# Altium PCB board1_v2.PcbDoc
Units mil, origin at the board's own origin, x right, y up, seen from the top; angles counter-clockwise.
Board outline 3500 x 2000 mil, 2 copper layers (Top Layer, Bottom Layer), stack 61.756 mil thick; 22 components, 12 nets, 57 pads, 11 vias.
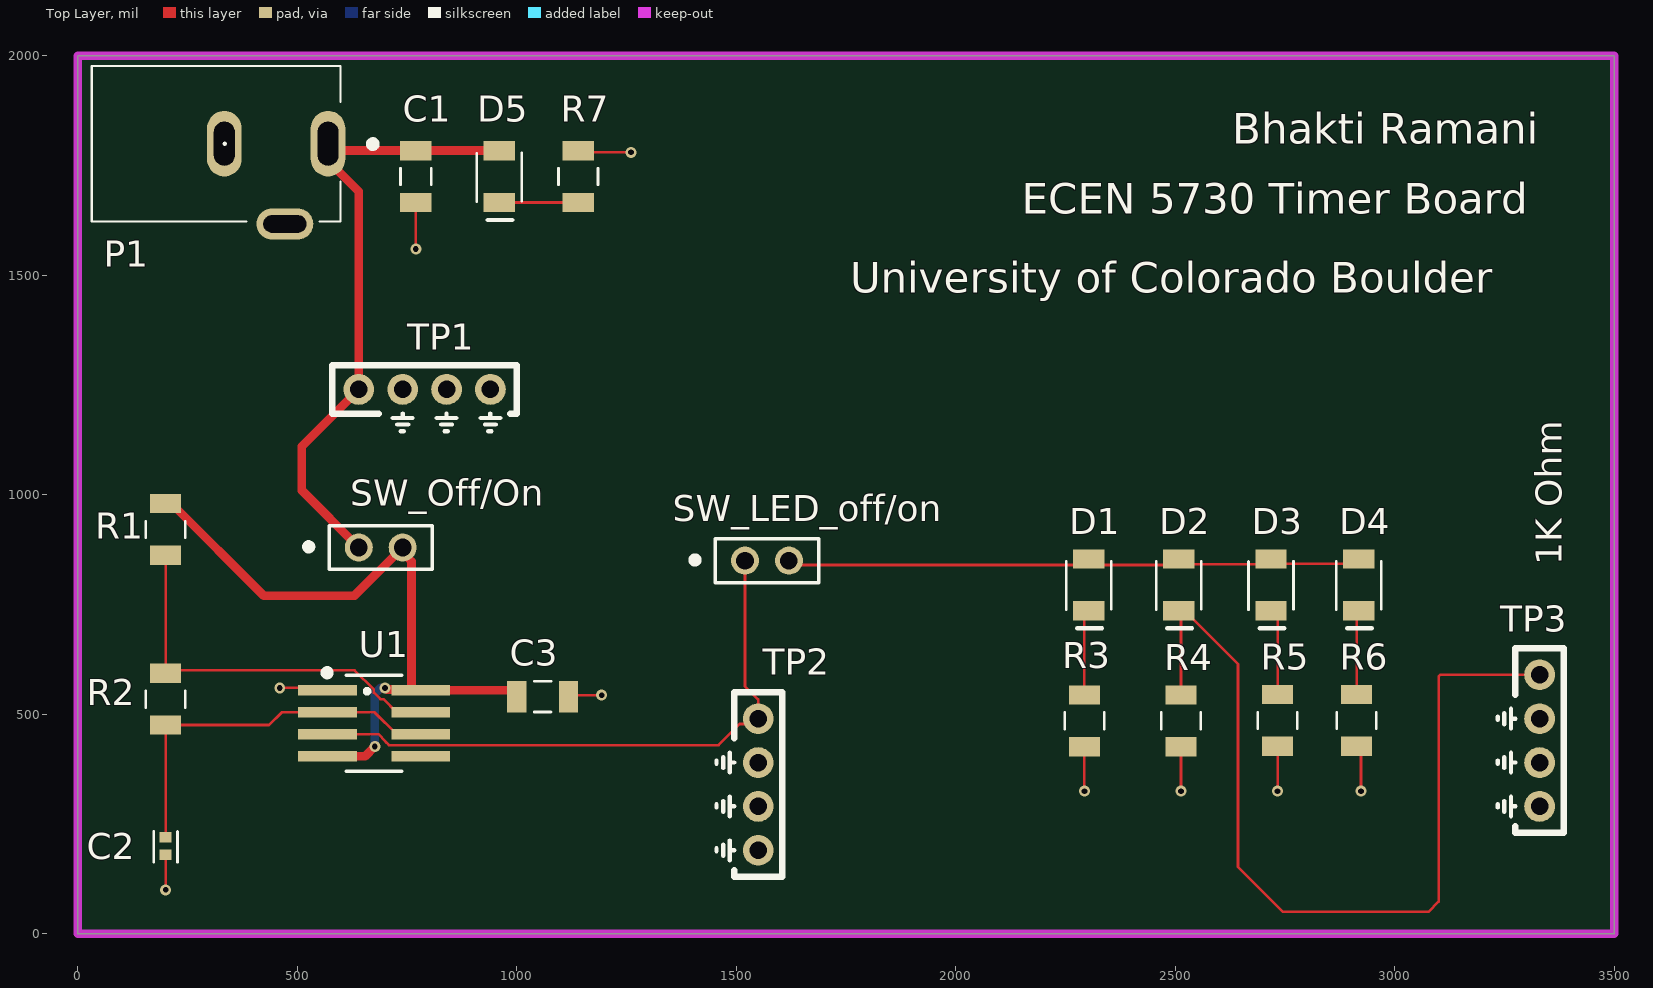
[diagram p0: Top Layer view]
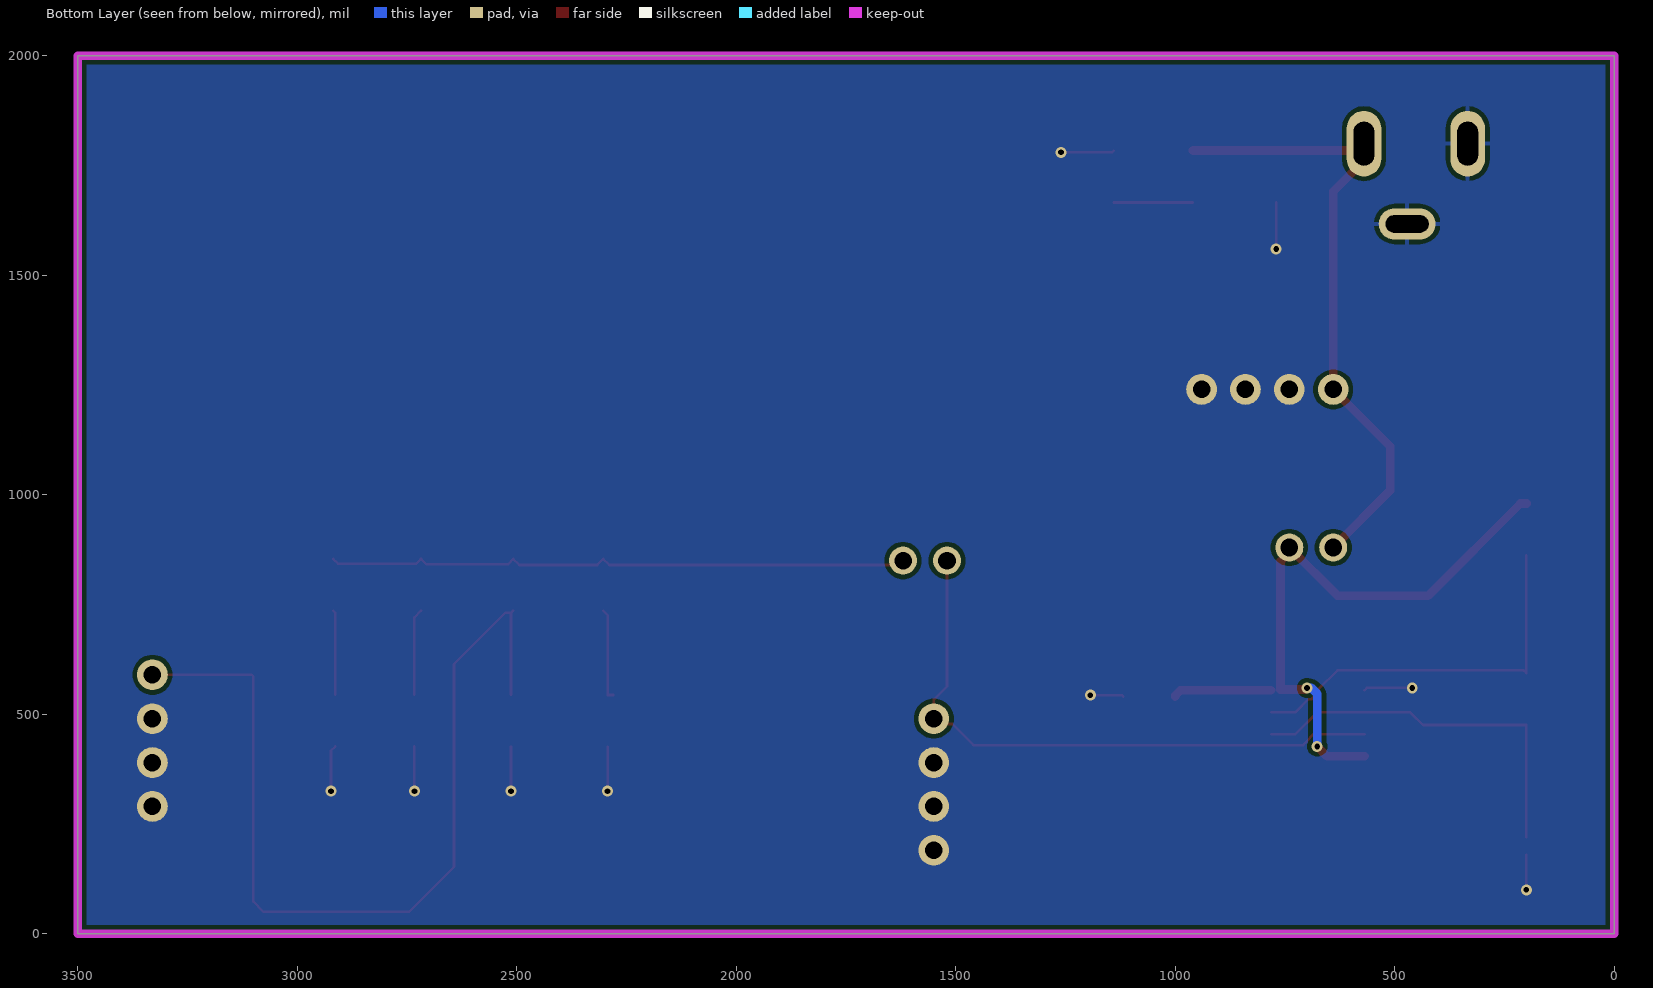
[diagram p1: Bottom Layer view, seen from below]
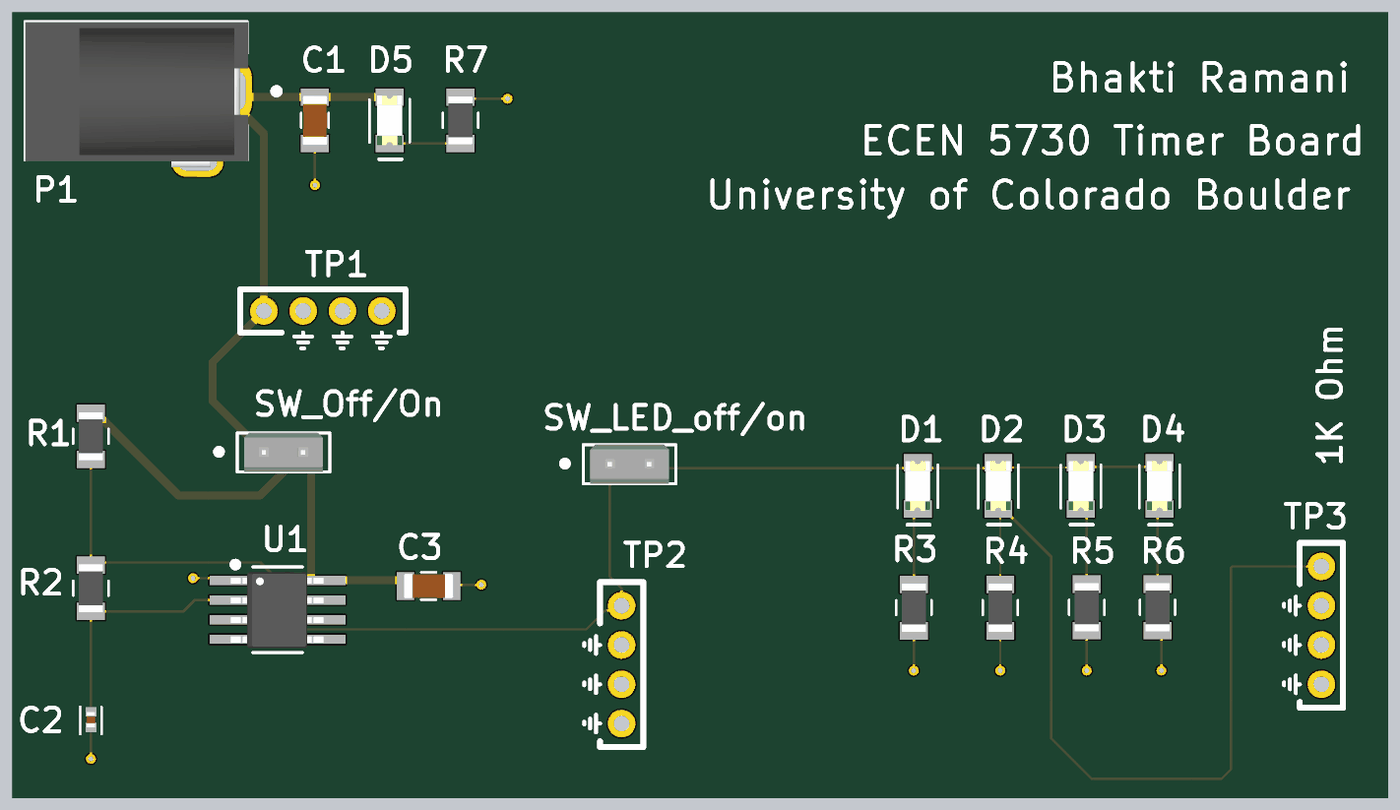
[diagram p2: 3D render of the assembled board from above, using the file's embedded part models]

## Layer stack, top to bottom
Top Solder: solder mask 1, SM-001, Dk 4
Top Layer: signal copper 1.378
Dielectric 1: core 59, Core-043, Dk 4.3
Bottom Layer: signal copper 1.378
Bottom Solder: solder mask 1, SM-001, Dk 4

## Board outline
0,0 3500,0 3500,2000 0,2000

## Design rules (kind name [scope] priority, off if disabled: settings)
Clearance [All] p1: gap=10 ignorepadtopadclearanceinfootprint=FALSE
PlaneClearance [All] p1: clearance=10
PlaneConnect [All] p1: planeconnectstyle=Direct reliefexpansion=20 reliefentries=4 reliefconductorwidth=10 reliefairgap=10
PolygonConnect [All] p1: connectstyle=Direct reliefconductorwidth=10 reliefentries=4 polygonreliefangle="90 Angle" airgapwidth=10
RoutingVias [All] p1: holewidth=13 width=25 viastyle="Through Hole" minholewidth=13 minwidth=25 maxholewidth=60 maxwidth=80
SolderMaskExpansion [All] p1: expansion=4 istentingtop=FALSE
SupplyNets "Schematic Supply Nets_1" [InNet('GND')] p1: voltage=0.000
SupplyNets "Schematic Supply Nets" [InNet('+5')] p2: voltage=0.000
UnRoutedNet [All] p1: checkbadconnections=TRUE
Width "Schematic Width Constraint_1" [InNet('555_5v')] p1: maxlimit=100 minlimit=10 preferedwidth=20 minimp=50.000000 maximp=50.000000 favimp=50.000000
Width "Schematic Width Constraint" [InNet('+5')] p2: maxlimit=100 minlimit=10 preferedwidth=20 minimp=50.000000 maximp=50.000000 favimp=50.000000
Width [All] p3: maxlimit=100 minlimit=6 preferedwidth=6 minimp=50.000000 maximp=50.000000 favimp=50.000000
27 further rules are at their usual default settings.

## Components (designator, comment, footprint, x,y, rotation, side; value= is the part's Value field where it differs from the comment)
C1 "22uF" 1206_Passive_Capacitor 770,1725 r270 top
C2 "1uF" 0402_Passive_Capacitor 200,200 r270 top
C3 "22uF" 1206_Passive_Capacitor 1059,540 r0 top
D1 "" LED_1206 2303.17,794.88 r270 top
D2 "" LED_1206 2508.17,794.88 r270 top
D3 "" LED_1206 2718.17,794.88 r270 top
D4 "Red" LED_1206 2918.17,794.88 r270 top
D5 "Red" LED_1206 960,1725 r270 top
P1 "Power Jack" Power_Jack 570,1800 r180 top value="CONN PWR JACK 2X5.5MM SOLDER"
R1 "1k" 1206_Passive_Resitor 200,921 r90 top value=1K
R2 "1k" 1206_Passive_Resitor 200,534.5 r90 top value=1K
R3 "1M" 1206_Passive_Resitor 2293.17,484.88 r270 top value=10K
R4 "1k" 1206_Passive_Resitor 2513.17,484.88 r270 top value=1K
R5 "300 Ohm" 1206_Passive_Resitor 2733.17,485.88 r270 top value=300
R6 "1k" 1206_Passive_Resitor 2913.17,485.88 r270 top value=50
R7 "1k" 1206_Passive_Resitor 1140,1725 r270 top value="1K Ohm"
SW_LED_off/on "SW_2Pin_100mil_Switch" 2Pin-Header-Conn 1520,850 r0 top (schematic designator SW_555_LED_off/on)
SW_Off/On "SW_2Pin_100mil_Switch" 2Pin-Header-Conn 640,879.93 r0 top (schematic designator SW_555_Off/On)
TP1 "TP_5V" TP10x_Probe 790,1240 r0 top
TP2 "TP_555_Output" TP10x_Probe 1550,340 r270 top
TP3 "TP_LED_Current" TP10x_Probe 3330,440 r270 top
U1 "fast_555" TS555IDTTR 675,479.58 r0 top

## Footprints (in the part's own frame and the unit in brackets; to place one, negate y for a bottom-side part, rotate by r counter-clockwise, add the part's x,y. Pads: shape width x height; smd on the part's side, far side on the other; paste and mask are expansions set on the pad)
2Pin-Header-Conn [mm]
  round 1.62 hole 1.02: 1(0,0) 2(2.54,0)
  silkscreen extent -3.02,-1.27 4.26,1.26, body extent -1.27,-1.27 3.81,1.27, height 8.13
0402_Passive_Capacitor [mm] "Reference: https://www.worthingtonassembly.com/perfect-0402-footprint"
  rect 0.6x0.7 smd mask+0: 1(-0.5,0) 2(0.5,0)
  silkscreen extent -0.84,-0.69 0.94,0.69, body extent -0.5,-0.27 0.5,0.28, height 0.5
1206_Passive_Capacitor [mil]
  rect 44x71 smd: 1(-59,0) 2(59,0)
  silkscreen extent -19,-35 19,35, body extent -63,-31 63,32, height 50
1206_Passive_Resitor [mil]
  rect 44x71 smd: 1(-59,0) 2(59,0)
  silkscreen extent -19,-45 19,45, body extent -61,-31 61,31, height 26
LED_1206 [mil]
  rect 44x71 smd: 1(-59,0) 2(59,0)
  silkscreen extent -54,-51 99,51, body extent -63,-31 63,31, height 28
Power_Jack [mm]
  oval 2x3.8 hole 1.2 slot 2.54 at 90 deg: 1(0,0) 2(6,0)
  oval 3.3x1.8 hole 1 slot 2.5 at 0 deg: 3(2.5,4.65)
  silkscreen extent -2.79,-4.5 13.68,4.5, body extent -0.76,-4.45 13.64,4.95, height 11.49
TP10x_Probe [mil] "Small Probs footprint"
  round 70 hole 40: 1(-150,0) 2(-50,0) 2(50,0) 2(150,0)
  silkscreen extent -210,-95 210,55
TS555IDTTR [mm] "IC OSC Single Timer 2.7MHz 8SOIC"
  rect 3.4x0.6 smd: 1(-2.7,1.905) 2(-2.7,0.635) 3(-2.7,-0.635) 4(-2.7,-1.905) 5(2.7,-1.905) 6(2.7,-0.635) 7(2.7,0.635) 8(2.7,1.905)
  silkscreen extent -2.85,-2.77 1.6,3.05, body extent -3.03,-2.48 2.96,2.43, height 1.75

## Part data
C1 C3: library part C_22uF_1206, "22uF ±10% 25V X5R 1206 Multilayer Ceramic Capacitors MLCC - SMD/SMT RoHS", LCSC Part#=C12891, MFR Part #=CL31A226KAHNNNE, Datasheet=https://datasheet.lcsc.com/lcsc/1811031514_Samsung-Electro-Mechanics-CL31A226KAHNNNE_C12891.pdf, Type=basic
C2: library part C_1uF_0402, "MULTILAYER CERAMIC CAPACITORS MLCC - SMD/SMT 1UF 25V 0402 ROHS", LCSC Part#=C52923, MFR Part #=CL05A105KA5NQNC, Datasheet=https://datasheet.lcsc.com/szlcsc/Samsung-Electro-Mechanics-CL05A105KA5NQNC_C52923.pdf, Type=Basic
D1 D2 D3 D4 D5: library part LED_RED_1206, "Red 621~631nm 1206 Light Emitting Diodes (LED) RoHS", LCSC Part#=C93133, MFR Part #=15-21/R6C-FQ1R1B/2T, Datasheet=https://datasheet.lcsc.com/szlcsc/1811151241_Everlight-Elec-15-21-R6C-FQ1R1B-2T_C93133.pdf, Type=Extended
P1: library part "P_Power Jack", "Power Barrel Connector Jack 2.10mm ID (0.083\"), 5.50mm OD (0.217\") Through Hole, Right Angle", LCSC Part#=C136744, MFR Part #=PJ-102A, Digikey Link=https://www.digikey.com/product-detail/en/PJ-102A/CP-102A-ND/275425/?itemSeq=304982367, Type=Extended
R1 R2 R4 R6 R7: library part R_1K_1206, "CHIP RESISTOR - SURFACE MOUNT 1KOHMS ±1% 1/4W 1206 ROHS", LCSC Part#=C4410, MFR Part #=RNCP1206FTD1K00CT, Digikey Link=https://www.digikey.com/product-detail/en/RNCP1206FTD1K00/RNCP1206FTD1K00CT-ND/2240675/?itemSeq=304982373, Type=Basic
R3: library part R_1M_1206, "CHIP RESISTOR - SURFACE MOUNT 1MOHMS ±1% 1/4W 1206 ROHS", LCSC Part#=C17927, MFR Part #=RMCF1206JT1M00, Digikey Link=https://www.digikey.com/product-detail/en/RMCF1206JT1M00/RMCF1206JT1M00CT-ND/1942830/?itemSeq=304982358, Type=Basic
R5: library part R_300Ohm_1206, "CHIP RESISTOR - SURFACE MOUNT 300OHMS ±1% 1/4W 1206 ROHS", LCSC Part#=C17887, MFR Part #=1206W4F3000T5E, Datasheet=https://datasheet.lcsc.com/szlcsc/Uniroyal-Elec-1206W4F3000T5E_C17887.pdf, Type=Basic
SW_LED_off/on SW_Off/On: "2Pin Header", LCSC Part#=C124375, Type=Extended
TP1 TP2 TP3: library part TP_10x_Probe, "Test Point 300 mil centers"
U1: library part U_555_Fast, "555 Type, Timer/Oscillator _Single_ IC 3MHz 8-SO", LCSC Part#=C90760, MFR Part #=LMC555CMX/NOPB, Package=SOIC-8, Digikey Link=https://www.digikey.com/product-detail/en/texas-instruments/LMC555CMX-NOPB/LMC555CMX-NOPBCT-ND/1010550, Type=Extended

## Via types
v1: diameter 25, hole 13, Top Layer to Bottom Layer, 10 vias
v2: diameter 25/25 (per signal layer), hole 13, Top Layer to Bottom Layer, 1 vias

## Nets (pads, with @x,y where several pads share a name; then routed paths per layer and width w, separated by ;. In a path a pad name is that pad's centre, name@x,y a point inside that pad or via, vN(x,y) a via of type N, cw(c..) or ccw(c..) an arc to the next point about the centre after c; other vN are vias at no path point)
555_5v: C3.1 R1.2 SW_Off/On.2 U1.4 U1.8 | length 1558.1
  Top Layer w20: R1.2 213.5,980 423.5,770 630.07,770 SW_Off/On.2 740,868.09 760,848.09 760,556.39 704.96,556.39 701.35,560 v1(700,560) ; U1.4 654.58,404.58 v1(676.55,426.55) ; U1.8 988,554.58 1000,542.58 C3.1
  Bottom Layer w20: v1(676.55,426.55) 676.55,546.55 690,560 v1(700,560)
555_output: SW_LED_off/on.1 TP2.1 U1.3 | length 1389.2
  Top Layer w6: U1.3 684.58,454.58 701.37,437.79 701.37,437.38 708.99,429.77 1459.77,429.77 1507.75,477.75 1537.75,477.75 TP2.1 1550,533.64 1520,563.64 SW_LED_off/on.1
+5: C1.1 D5.1 P1.1 SW_Off/On.1 TP1.1 | length 1428.4
  Top Layer w20: P1.1 588.11,1781.89 590.22,1784 C1.1 D5.1 ; P1.1@586.22,1780 586.22,1744.57 640,1690.79 TP1.1 510,1110 510,1009.93 SW_Off/On.1
GND: C1.2 C2.2 C3.2 P1.2 P1.3 R3.2 R4.2 R5.2 R6.2 R7.1 TP1.2 TP2.2 TP3.2 U1.1 | length 899.8
  Top Layer w6: C2.2 200,106.95 v1@200.77,106.18 ; v1(460,560) 563.28,560 U1.1 ; v1(770,1560) C1.2 ; C3.2 1121.35,543.35 v1(1193.25,543.35) ; R7.1 1144,1780 v2(1260,1780) ; v1(2293.17,324.88) R3.2 ; v1(2513.17,324.88) R4.2 ; v1(2733.17,324.88) R5.2 ; R6.2 2923.17,416.88 v1(2923.17,324.88)
  other v1: 200,100
NetC2_1: C2.1 R2.1 U1.2 U1.6 | length 869.9
  Top Layer w6: C2.1 R2.1 435.5,475.5 464.58,504.58 U1.2 676.18,504.58 726.18,454.58 U1.6
NetD1_1: D1.1 D2.1 D3.1 D4.1 SW_LED_off/on.2 | length 1338.7
  Top Layer w6: SW_LED_off/on.2 1630,840 2289.28,840 D1.1 2317.05,840 2494.28,840 D2.1 2520.43,841.62 2705.9,841.62 D3.1 2729,843.05 2907.33,843.05 D4.1
NetD1_2: D1.2 R3.1 | length 209.6
  Top Layer w6: R3.1@2279.67,543.88 R3.1 2293.17,725.88 D1.2
NetD2_2: D2.2 R4.1 TP3.1 | length 2087.9
  Top Layer w6: D2.2 D2.2@2513.17,730.88 ; R4.1 D2.2@2513.17,730.88 ; TP3.1 3103.51,590 3100,586.49 3100,73.51 3076.49,50 2745.28,50 2642.97,152.31 2642.97,614.58 2526.67,730.88 D2.2@2513.17,730.88
NetD3_2: D3.2 R5.1 | length 197.2
  Top Layer w6: D3.2 2733.17,720.88 R5.1
NetD4_2: D4.2 R6.1 | length 193.1
  Top Layer w6: R6.1 2913.17,730.88 D4.2
NetD5_2: D5.2 R7.2 | length 180
  Top Layer w6: D5.2 R7.2
NetR1_1: R1.1 R2.2 U1.7 | length 896
  Top Layer w6: R1.1 R2.2 206.5,600 630.76,600 674.5,556.26 674.5,549.44 689.44,534.5 696.26,534.5 726.18,504.58 U1.7
pads on no net: U1.5

## Polygon pours and split planes (outlines as drawn)
GND on Bottom Layer "GND_L02_P000" (solid, pour order 0): -0.31,1998.34 3499.69,1998.34 3499.69,-1.66 -0.31,-1.66

## Keep-outs
Keep-Out Layer:
  the board outline again, w20

## Silkscreen, mask and mechanical layers (free items; w line width, h text height)
Top Overlay:
  text "Bhakti Ramani" at 2630,1800 h70
  text "ECEN 5730 Timer Board" at 2150,1640 h70
  text "University of Colorado Boulder" at 1760,1460 h70
  text "1K Ohm" at 3380,840 h60 r90